# Altium PCB Final decision V3.PcbDoc (part 1 of 2)
Units mm, origin at the board's own origin, x right, y up, seen from the top; angles counter-clockwise.
Board outline 102.3 x 84 mm, 2 copper layers (Top Layer, Bottom Layer); 138 components, 123 nets, 552 pads, 289 vias.
Unrouted connection lines stored in the file: 2.
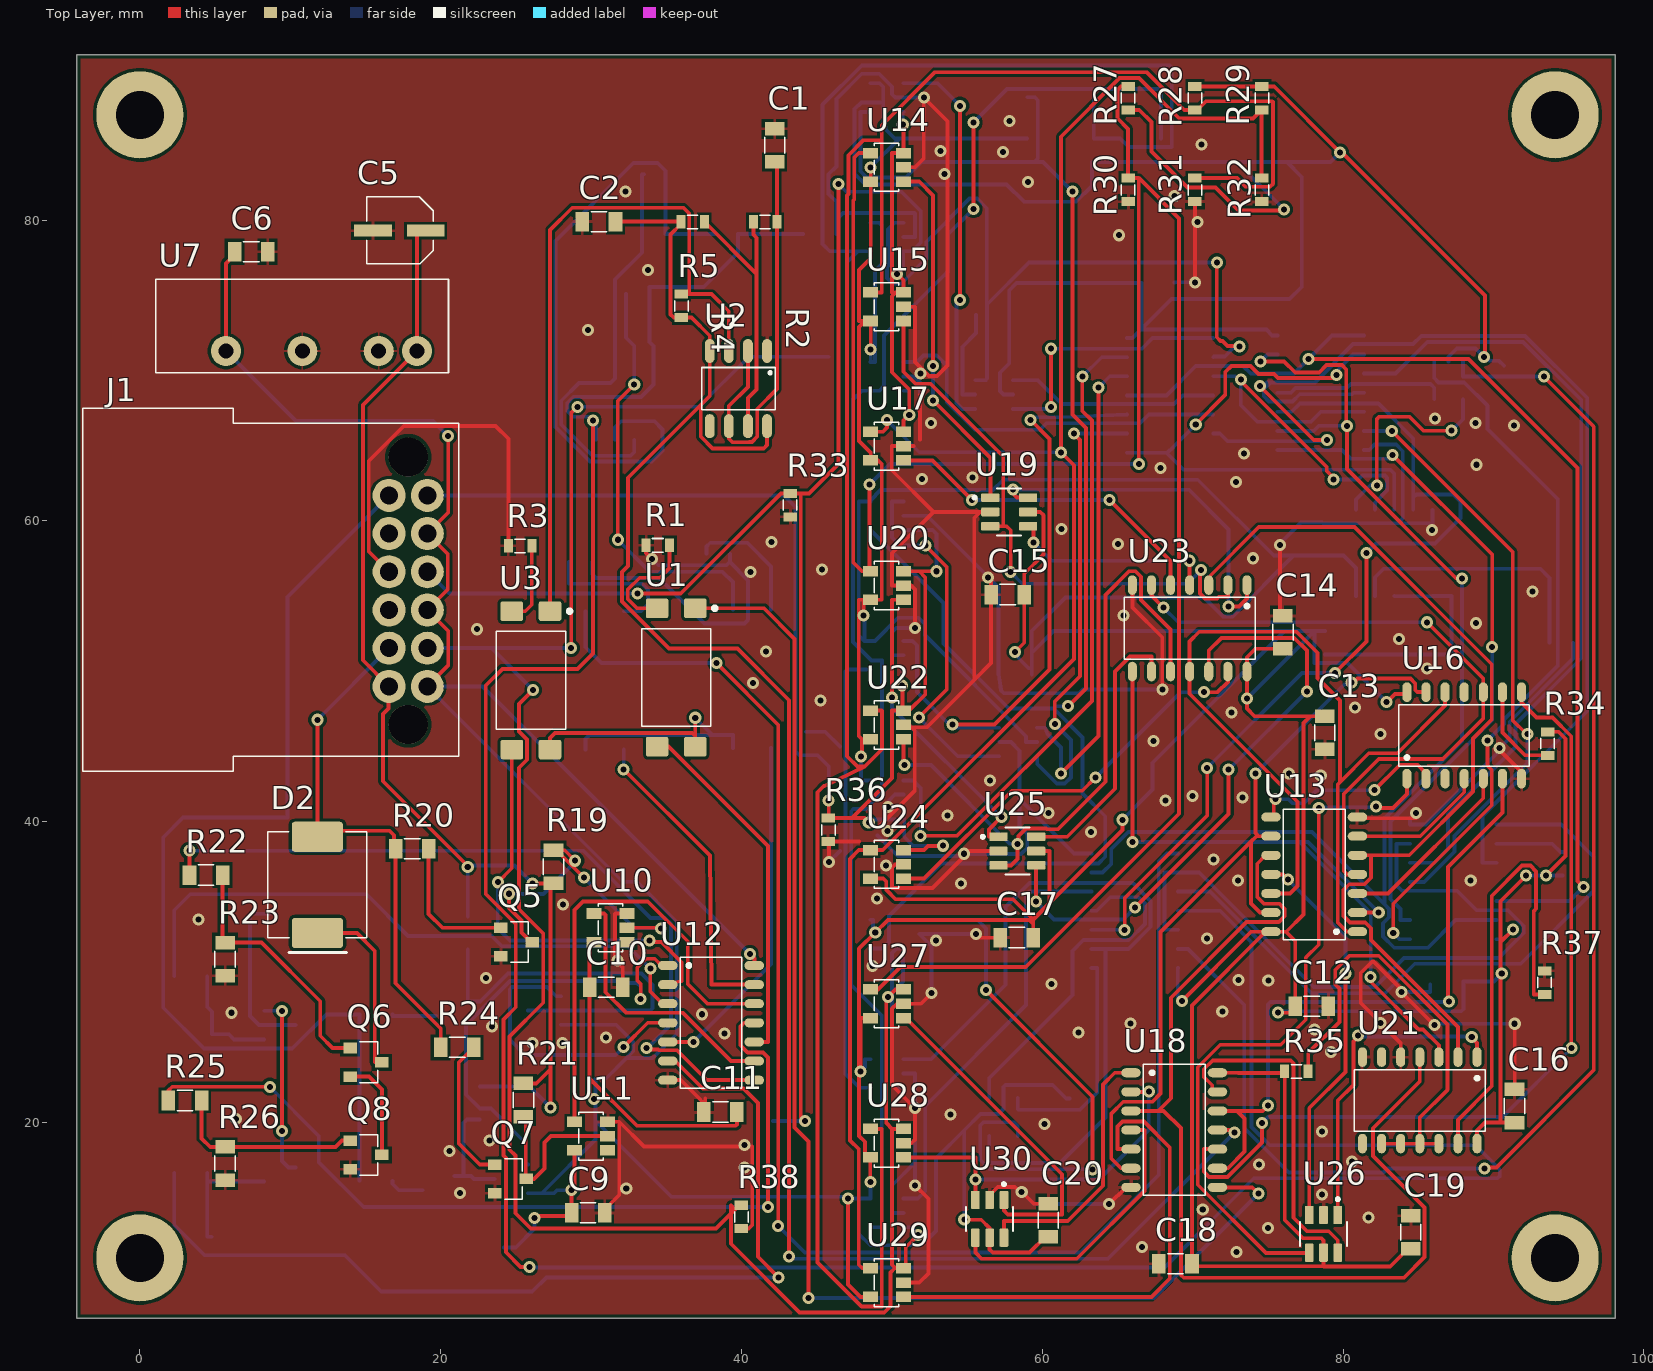
[diagram p0: Top Layer view]
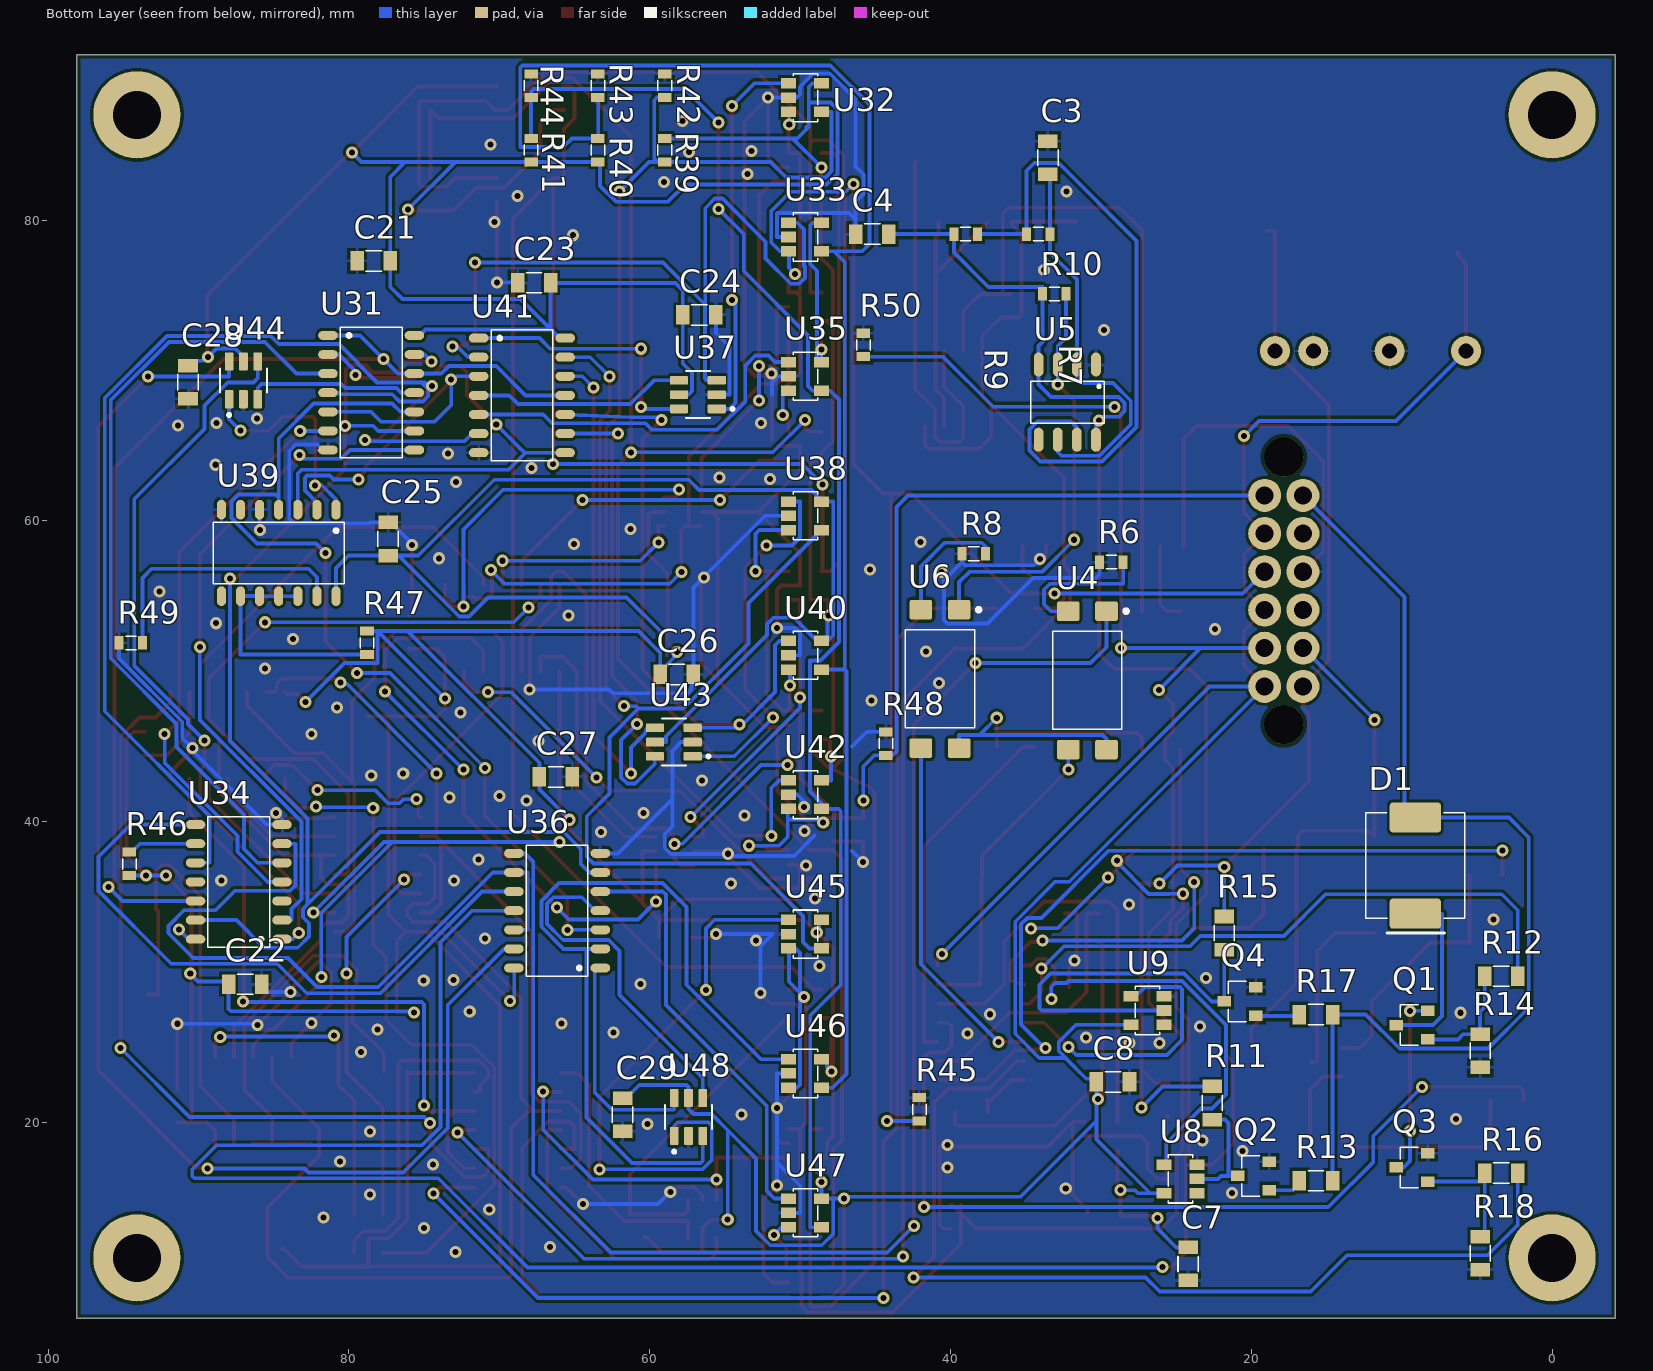
[diagram p1: Bottom Layer view, seen from below]

## Layer stack, top to bottom
Top Solder: solder mask 0.0102, Solder Resist, Dk 3.5
Top Layer: signal copper 0.0356
Dielectric 1: dielectric 0.32, FR-4, Dk 4.8
Bottom Layer: signal copper 0.0356
Bottom Solder: solder mask 0.0102, Solder Resist, Dk 3.5

## Board outline
-4.2,7 -4.2,91 98.1,91 98.1,7

## Design rules (kind name [scope] priority, off if disabled: settings)
AcuteAngle [All] p1: minimum=3.50000000000000E+0001 checktracksonly=FALSE
BoardOutlineClearance "BoardOutlineClearance 1" [All] p1: gap=0.25 ignorepadtopadclearanceinfootprint=FALSE except(0: Arc-SplitContinuation Track-SplitContinuation SMDPad-SplitContinuation THPad-SplitContinuation Via-SplitContinuation Fill-SplitContinuation Poly-SplitContinuation Region-SplitContinuation Text-SplitContinuation) // Milling
Clearance "Clearance-1 1/2 Oz" [All] p1: gap=0.125 ignorepadtopadclearanceinfootprint=FALSE except(0.2: Arc-Fill Arc-Poly Track-Fill Track-Poly SMDPad-SMDPad SMDPad-Fill SMDPad-Poly THPad-Fill THPad-Poly Via-Fill Via-Poly Fill-Fill Fill-Poly Poly-Poly Poly-Region Poly-Text; 0.25: Arc-Hole Track-Hole SMDPad-Hole THPad-Hole Via-Hole Fill-Hole Poly-Hole Region-Hole Text-Hole) // Standart
ComponentClearance [All] p1: gap=0.1 collisioncheckmode=3 verticalgap=0.1 showdistances=FALSE
DiffPairsRouting "DiffPairsRouting 1/2 Oz" [All] p1: maxlimit=0.254 minlimit=0.125 mostfreqgap=0.254 toplayer_minwidth=0.125 toplayer_maxwidth=0.381 toplayer_prefwidth=0.381 bottomlayer_minwidth=0.125 bottomlayer_maxwidth=0.381 bottomlayer_prefwidth=0.381 maxuncoupledlength=12.7
HoleSize "Minimum HoleSize" [IsPad] p1: absolutevalues=TRUE maxlimit=5.9 minlimit=0.6 maxpercent=80.000 minpercent=20.000
HoleSize "Minimum HoleSize VIA 1" [IsVia] p2: absolutevalues=TRUE maxlimit=5.9 minlimit=0.3 maxpercent=80.000 minpercent=20.000 // Standart
HoleToHoleClearance Hole2HoleClearance [All] p1: gap=0.25 allowstackedmicrovias=FALSE
MinimumAnnularRing "Minimum AR VIA Standart" [All] p1: minimumring=0.15
MinimumAnnularRing "Minimum AR PAD Standart" [All] p2: minimumring=0.2
MinimumSolderMaskSliver "SolderMask Bridge Standart" [All] p1: minsoldermaskwidth=0.15 // All Masks
PlaneClearance "PlaneClearance-1 1/2 Oz" [All] p1: clearance=0.2 // Standart
PlaneConnect "TermalConnect-1 1/2 Oz" [All] p1: planeconnectstyle=Relief reliefexpansion=0.2 reliefentries=4 reliefconductorwidth=0.2 reliefairgap=0.2 // Standart
PolygonConnect "PolygonConnect-1 1/2 Oz" [All] p1: thpad.connectstyle=Relief thpad.reliefconductorwidth=0.15 thpad.reliefentries=4 thpad.polygonreliefangle="90 Angle" thpad.airgapwidth=0.2 smdpad.connectstyle=Relief smdpad.reliefconductorwidth=0.2 smdpad.reliefentries=4 smdpad.polygonreliefangle="90 Angle" smdpad.airgapwidth=0.2 via.connectstyle=Direct via.reliefconductorwidth=0.254 via.reliefentries=4 via.polygonreliefangle="90 Angle" via.airgapwidth=0.254 // Standart
RoutingCorners [All] p1 off: cornerstyle=45-Degree minsetback=2.54 maxsetback=2.54
RoutingVias [All] p1: holewidth=0.4 width=0.8 viastyle="Through Hole" minholewidth=0.3 minwidth=0.6 maxholewidth=5.9 maxwidth=8.9
SilkToSilkClearance Silk2SilkClearance [All] p1 off: silktosilkclearance=0.15
SilkToSolderMaskClearance Silk2SolderMaskClearance [IsPad] p1 off: minsilkscreentomaskgap=0.15 clearancetoexposedcopper=TRUE
SolderMaskExpansion SolderMaskExpansion-1 [All] p1: expansion=0.05 istentingtop=FALSE // Standart
UnRoutedNet [All] p1: checkbadconnections=TRUE
Width "Width 1/2 Oz" [All] p1: maxlimit=10 minlimit=0.125 preferedwidth=0.254 checkconnectedcopper=TRUE
19 further rules are at their usual default settings.

## Classes and differential pairs
channel class SignalReciever: Reciever1 Reciever2
channel class Logic: Primary Secondary
component class "Sheet1 V2": C5 C6 C7 C8 C9 C10 C11 D1 D2 J1 Q1 Q2 Q3 Q4 Q5 Q6 Q7 Q8 R11 R12 R13 R14 R15 R16 R17 R18 R19 R20 R21 R22 R23 R24 R25 R26 U7 U8 U9 U10 U11 U12
component class Secondary: C3 C4 R6 R7 R8 R9 R10 U4 U5 U6
component class Reciever2: C21 C22 C23 C24 C25 C26 C27 C28 C29 R39 R40 R41 R42 R43 R44 R45 R46 R47 R48 R49 R50 U31 U32 U33 U34 U35 U36 U37 U38 U39 U40 U41 U42 U43 U44 U45 U46 U47 U48
component class Reciever1: C12 C13 C14 C15 C16 C17 C18 C19 C20 R27 R28 R29 R30 R31 R32 R33 R34 R35 R36 R37 R38 U13 U14 U15 U16 U17 U18 U19 U20 U22 U23 U24 U25 U26 U27 U28 U29 U30
component class Primary: C1 C2 R1 R2 R3 R4 R5 U1 U2 U3

## Components (designator, comment, footprint, x,y, rotation, side; value= is the part's Value field where it differs from the comment)
C1 "4.7uF" "0805 Capicator" 42.207,84.972 r90 top (schematic designator C12)
C2 "10nF" "0805 Capicator" 30.523,79.892 r0 top (schematic designator C13)
C3 "4.7uF" "0805 Capicator" 33.528,84.154 r90 bottom (schematic designator C12)
C4 "10nF" "0805 Capicator" 45.212,79.074 r180 bottom (schematic designator C13)
C5 "4.7uF" "Bar Cap 4x5.4" 15.5,79.3 r90 top (schematic designator C1)
C6 "4.7uF" "0805 Capicator" 7.4,77.9 r180 top (schematic designator C2)
C7 "0.1uF" "0805 Capicator" 24.2,10.6 r270 bottom (schematic designator C17)
C8 "0.1uF" "0805 Capicator" 29.2,22.7 r180 bottom (schematic designator C16)
C9 "0.1uF" "0805 Capicator" 29.8,14 r0 top (schematic designator C15)
C10 "0.1uF" "0805 Capicator" 31,29 r0 top (schematic designator C14)
C11 "0.1uF" "0805 Capicator" 38.6,20.7 r0 top (schematic designator C18)
C12 "0.1uF" "0805 Capicator" 77.918,27.736 r180 top (schematic designator C8)
C13 "0.1uF" "0805 Capicator" 78.784,45.915 r90 top (schematic designator C10)
C14 "0.1uF" "0805 Capicator" 76,52.6 r270 top (schematic designator C5)
C15 "0.1uF" "0805 Capicator" 57.7,55.1 r0 top (schematic designator C4)
C16 "0.1uF" "0805 Capicator" 91.4,21.1 r270 top (schematic designator C6)
C17 "0.1uF" "0805 Capicator" 58.3,32.3 r0 top (schematic designator C3)
C18 "0.1uF" "0805 Capicator" 68.856,10.61 r0 top (schematic designator C7)
C19 "0.1uF" "0805 Capicator" 84.5,12.7 r270 top (schematic designator C11)
C20 "0.1uF" "0805 Capicator" 60.4,13.5 r270 top (schematic designator C9)
C21 "0.1uF" "0805 Capicator" 78.355,77.29 r180 bottom (schematic designator C8)
C22 "0.1uF" "0805 Capicator" 86.9,29.2 r0 bottom (schematic designator C10)
C23 "0.1uF" "0805 Capicator" 67.691,75.842 r180 bottom (schematic designator C5)
C24 "0.1uF" "0805 Capicator" 56.7,73.7 r0 bottom (schematic designator C4)
C25 "0.1uF" "0805 Capicator" 77.4,58.8 r270 bottom (schematic designator C6)
C26 "0.1uF" "0805 Capicator" 58.2,49.8 r0 bottom (schematic designator C3)
C27 "0.1uF" "0805 Capicator" 66.238,42.977 r0 bottom (schematic designator C7)
C28 "0.1uF" "0805 Capicator" 90.7,69.223 r90 bottom (schematic designator C11)
C29 "0.1uF" "0805 Capicator" 61.801,20.509 r90 bottom (schematic designator C9)
D1 "Diode" DO-214AB(SMC) 9.097,37.087 r270 bottom (schematic designator D2)
D2 "Diode" DO-214AB(SMC) 11.8,35.8 r270 top (schematic designator D1)
J1 "Conn6x2" Conn6x2(Molex) 17.842,64.242 r270 top
Q1 "MOSFET-N[FDN337N]" SOT-23 8.267,25.53 r90 bottom (schematic designator Q5)
Q2 "NPN" SOT-23 18.8,15.5 r90 bottom (schematic designator Q8)
Q3 "MOSFET-N[FDN337N]" SOT-23 8.267,16.071 r90 bottom (schematic designator Q6)
Q4 "NPN" SOT-23 19.7,27.1 r90 bottom (schematic designator Q7)
Q5 "NPN" SOT-23 24,32.95 r270 top (schematic designator Q4)
Q6 "MOSFET-N[FDN337N]" SOT-23 13.982,24.956 r270 top (schematic designator Q1)
Q7 "NPN" SOT-23 23.6,17.2 r270 top (schematic designator Q3)
Q8 "MOSFET-N[FDN337N]" SOT-23 13.982,18.799 r270 top (schematic designator Q2)
R1 "1k" "0603 Resistor" 34.434,58.383 r0 top (schematic designator R31)
R2 "51k" "0603 Resistor" 41.572,79.892 r0 top (schematic designator R29)
R3 "1k" "0603 Resistor" 25.28,58.337 r0 top (schematic designator R33)
R4 "4.7k" "0603 Resistor" 36.746,79.892 r0 top (schematic designator R30)
R5 "22k" "0603 Resistor" 36,74.3 r90 top (schematic designator R32)
R6 "1k" "0603 Resistor" 29.301,57.265 r180 bottom (schematic designator R31)
R7 "51k" "0603 Resistor" 34.163,79.074 r180 bottom (schematic designator R29)
R8 "1k" "0603 Resistor" 38.455,57.819 r180 bottom (schematic designator R33)
R9 "4.7k" "0603 Resistor" 38.989,79.074 r180 bottom (schematic designator R30)
R10 "22k" "0603 Resistor" 33.1,75.1 r180 bottom (schematic designator R32)
R11 "1k" "0805 Resistor" 22.6,21.3 r90 bottom (schematic designator R16)
R12 "20k" "0805 Resistor" 3.382,29.721 r180 bottom (schematic designator R10)
R13 "20k" "0805 Resistor" 15.701,16.132 r180 bottom (schematic designator R14)
R14 "10k" "0805 Resistor" 4.779,24.768 r90 bottom (schematic designator R11)
R15 "1k" "0805 Resistor" 21.8,32.6 r90 bottom
R16 "20k" "0805 Resistor" 3.382,16.64 r180 bottom (schematic designator R9)
R17 "20k" "0805 Resistor" 15.701,27.181 r180 bottom (schematic designator R13)
R18 "10k" "0805 Resistor" 4.779,11.306 r90 bottom (schematic designator R12)
R19 "1k" "0805 Resistor" 27.5,37 r270 top (schematic designator R8)
R20 "20k" "0805 Resistor" 18.1,38.2 r180 top (schematic designator R6)
R21 "1k" "0805 Resistor" 25.5,21.5 r90 top (schematic designator R7)
R22 "20k" "0805 Resistor" 4.398,36.452 r180 top (schematic designator R1)
R23 "10k" "0805 Resistor" 5.668,30.864 r90 top (schematic designator R3)
R24 "20k" "0805 Resistor" 21.1,25 r180 top (schematic designator R5)
R25 "20k" "0805 Resistor" 3.001,21.466 r180 top (schematic designator R2)
R26 "10k" "0805 Resistor" 5.668,17.275 r90 top (schematic designator R4)
R27 "1k" "0603 Resistor" 65.707,88.11 r90 top (schematic designator R23)
R28 "2k" "0603 Resistor" 70.152,88.11 r90 top (schematic designator R25)
R29 "3k" "0603 Resistor" 74.597,88.11 r90 top (schematic designator R27)
R30 "3k9" "0603 Resistor" 65.707,82.014 r90 top (schematic designator R24)
R31 "3k" "0603 Resistor" 70.152,82.014 r90 top (schematic designator R26)
R32 "2k" "0603 Resistor" 74.597,82.014 r90 top (schematic designator R28)
R33 "1k" "0603 Resistor" 43.239,61.05 r90 top (schematic designator R17)
R34 "1k" "0603 Resistor" 93.6,45.2 r90 top (schematic designator R20)
R35 "10k" "0603 Resistor" 76.9,23.4 r0 top (schematic designator R21)
R36 "1k" "0603 Resistor" 45.779,39.46 r90 top (schematic designator R18)
R37 "10k" "0603 Resistor" 93.4,29.3 r90 top (schematic designator R22)
R38 "1k" "0603 Resistor" 40,13.72 r90 top (schematic designator R19)
R39 "1k" "0603 Resistor" 59.002,84.653 r270 bottom (schematic designator R23)
R40 "2k" "0603 Resistor" 63.447,84.653 r270 bottom (schematic designator R25)
R41 "3k" "0603 Resistor" 67.892,84.653 r270 bottom (schematic designator R27)
R42 "3k9" "0603 Resistor" 59.002,88.949 r270 bottom (schematic designator R24)
R43 "3k" "0603 Resistor" 63.447,88.949 r270 bottom (schematic designator R26)
R44 "2k" "0603 Resistor" 67.892,88.949 r270 bottom (schematic designator R28)
R45 "1k" "0603 Resistor" 42.076,20.876 r270 bottom (schematic designator R17)
R46 "1k" "0603 Resistor" 94.6,37.2 r270 bottom (schematic designator R20)
R47 "10k" "0603 Resistor" 78.8,51.9 r270 bottom (schematic designator R21)
R48 "1k" "0603 Resistor" 44.3,45.2 r270 bottom (schematic designator R18)
R49 "10k" "0603 Resistor" 94.5,51.9 r0 bottom (schematic designator R22)
R50 "1k" "0603 Resistor" 45.8,71.7 r270 bottom (schematic designator R19)
U1 "Opt" FAIR-MDIP-4_V 35.656,49.593 r270 top (schematic designator U52)
U2 "NE555P" SOIC-8 41.699,71.303 r270 top (schematic designator U53)
U3 "Opt" FAIR-MDIP-4_V 26,49.4 r270 top (schematic designator U54)
U4 "Opt" FAIR-MDIP-4_V 30.9,49.4 r270 bottom (schematic designator U52)
U5 "NE555P" SOIC-8 30.33,70.4 r270 bottom (schematic designator U53)
U6 "Opt" FAIR-MDIP-4_V 40.7,49.5 r270 bottom (schematic designator U54)
U7 "DC/DC" SIP7 18.42,71.3 r270 top (schematic designator U1)
U8 "Single inverter" SOT-23-5 23.6,16.25 r90 bottom (schematic designator U6)
U9 "Single inverter" SOT-23-5 25.8,27.45 r90 bottom (schematic designator U4)
U10 "Single inverter" SOT-23-5 32.4,32.95 r90 top (schematic designator U3)
U11 "Single inverter" SOT-23-5 31.1,19.1 r90 top (schematic designator U2)
U12 "2AND" SOIC-14 35.1,30.44 r270 top (schematic designator U9)
U13 "2XOR" SOIC-14 80.958,32.689 r90 top (schematic designator U36)
U14 "Comparator" SOT-23-5 50.769,83.514 r90 top (schematic designator U15)
U15 "Comparator" SOT-23-5 50.769,74.245 r90 top (schematic designator U16)
U16 "4AND" SOIC-14 84.245,42.867 r0 top (schematic designator U45)
U17 "Comparator" SOT-23-5 50.769,64.975 r90 top
U18 "2AND" SOIC-14 65.9,23.31 r270 top (schematic designator U29)
U19 "Inv" SOT236 57.8,60.6 r0 top (schematic designator U5)
U20 "Comparator" SOT-23-5 50.769,55.706 r90 top (schematic designator U18)
U21 "4NOR" SOIC-14 88.91,24.35 r180 top (schematic designator U41)
U22 "Comparator" SOT-23-5 50.769,46.436 r90 top (schematic designator U19)
U23 "2AND" SOIC-14 73.61,55.738 r180 top (schematic designator U28)
U24 "Comparator" SOT-23-5 50.769,37.167 r90 top (schematic designator U20)
U25 "Inv" SOT236 58.345,38.05 r0 top (schematic designator U23)
U26 "Inv" SOT236 78.7,12.6 r270 top (schematic designator U43)
U27 "Comparator" SOT-23-5 50.769,27.897 r90 top (schematic designator U12)
U28 "Comparator" SOT-23-5 50.769,18.628 r90 top (schematic designator U13)
U29 "Comparator" SOT-23-5 50.769,9.358 r90 top (schematic designator U14)
U30 "Inv" SOT236 56.5,13.6 r270 top (schematic designator U21)
U31 "2XOR" SOIC-14 81.395,72.337 r270 bottom (schematic designator U36)
U32 "Comparator" SOT-23-5 50.769,88.149 r270 bottom (schematic designator U15)
U33 "Comparator" SOT-23-5 50.769,78.879 r270 bottom (schematic designator U16)
U34 "4AND" SOIC-14 84.45,32.19 r90 bottom (schematic designator U45)
U35 "Comparator" SOT-23-5 50.769,69.61 r270 bottom (schematic designator U17)
U36 "2AND" SOIC-14 63.282,30.277 r90 bottom (schematic designator U29)
U37 "Inv" SOT236 56.8,68.4 r0 bottom (schematic designator U5)
U38 "Comparator" SOT-23-5 50.769,60.34 r270 bottom (schematic designator U18)
U39 "4NOR" SOIC-14 80.86,60.75 r0 bottom (schematic designator U41)
U40 "Comparator" SOT-23-5 50.769,51.071 r270 bottom (schematic designator U19)
U41 "2AND" SOIC-14 71.374,72.159 r270 bottom (schematic designator U28)
U42 "Comparator" SOT-23-5 50.769,41.801 r270 bottom (schematic designator U20)
U43 "Inv" SOT236 58.4,45.3 r0 bottom (schematic designator U23)
U44 "Inv" SOT236 87.017,69.35 r90 bottom (schematic designator U43)
U45 "Comparator" SOT-23-5 50.769,32.532 r270 bottom (schematic designator U12)
U46 "Comparator" SOT-23-5 50.769,23.262 r270 bottom (schematic designator U13)
U47 "Comparator" SOT-23-5 50.769,13.993 r270 bottom (schematic designator U14)
U48 "Inv" SOT236 57.422,20.367 r90 bottom (schematic designator U21)

## Footprints (in the part's own frame and the unit in brackets; to place one, negate y for a bottom-side part, rotate by r counter-clockwise, add the part's x,y. Pads: shape width x height; smd on the part's side, far side on the other; paste and mask are expansions set on the pad)
"0603 Resistor" [mm]
  rect 0.6x0.9 smd: 1(-0.78,0) 2(0.78,0)
  silkscreen extent -0.35,-0.45 0.35,0.45, body extent -0.85,-0.45 0.85,0.45, height 0.55
"0805 Capicator" [mm]
  rect 0.9x1.3 smd: 1(-1.1,0) 2(1.1,0)
  silkscreen extent -0.52,-0.67 0.52,0.67, body extent -1.05,-0.67 1.05,0.68, height 0.75
"0805 Resistor" [mm]
  rect 0.9x1.3 smd: 1(-1.1,0) 2(1.1,0)
  silkscreen extent -0.53,-0.67 0.53,0.67, body extent -1.05,-0.67 1.05,0.68, height 0.6
"Bar Cap 4x5.4" [mm]
  rect 0.8x2.5 smd: 1(0,0) 2(0,-3.5)
  silkscreen extent -2.2,-4 2.25,0.42, body extent -2.15,-4.3 2.15,0.7, height 5.4
Conn6x2(Molex) [mm]
  round 2.2 hole 1.2: 1(2.54,1.27) 2(5.08,1.27) 3(7.62,1.27) 4(10.16,1.27) 5(12.7,1.27) 6(15.24,1.27) 7(2.54,-1.27) 8(5.08,-1.27) 9(7.62,-1.27) 10(10.16,-1.27) 11(12.7,-1.27) 12(15.24,-1.27)
  round 2.6 hole 2.6 unplated: A(0,0) A(17.78,0)
  silkscreen extent -3.25,-21.63 20.88,3.37, body extent -3.15,-31.93 20.79,3.23, height 22.06
DO-214AB(SMC) [mm]
  rrect20% 2x3.4 smd: 1(-3.2,0) 2(3.2,0)
  silkscreen extent -3.53,-3.3 4.5,3.3, body extent -4.06,-3.15 4.06,3.15, height 2.77
FAIR-MDIP-4_V [mm]
  rrect20% 1.3x1.5 smd: 1(-4.6,1.27) 2(-4.6,-1.27) 3(4.6,-1.27) 4(4.6,1.27)
  silkscreen extent -4.72,-2.3 3.25,2.7, body extent -5.08,-2.3 5.08,2.3, height 3.85
SIP7 [mm]
  round 2 hole 1: 1(0,0) 2(0,-2.54) 4(0,-7.62) 6(0,-12.7)
  silkscreen extent -4.77,-17.35 1.45,2.1, body extent -4.7,-17.27 1.39,2.03, height 10.16
SOIC-8 [mm]
  oval 1.6x0.65 smd: 1(0,0) 2(0,-1.27) 3(0,-2.54) 4(0,-3.81) 5(5,-3.81) 6(5,-2.54) 7(5,-1.27) 8(5,0)
  silkscreen extent 1.1,-4.35 3.9,0.55, body extent -0.36,-4.35 5.41,0.55, height 1.45
SOIC-14 [mm]
  oval 0.6x1.3 smd paste+0 mask+0.1: 1(0,0) 2(1.27,0) 3(2.54,0) 4(3.81,0) 5(5.08,0) 6(6.35,0) 7(7.62,0) 8(7.62,5.75) 9(6.35,5.75) 10(5.08,5.75) 11(3.81,5.75) 12(2.54,5.75) 13(1.27,5.75) 14(0,5.75)
  silkscreen extent -0.55,0.82 8.15,4.93, body extent -0.52,-0.12 8.13,5.87, height 1.75
SOT236 [mm]
  rrect25% 1.21x0.58 smd: 1(-1.255,0.95) 2(-1.255,0) 3(-1.255,-0.95) 4(1.255,-0.95) 5(1.255,0) 6(1.255,0.95)
  silkscreen extent -2.4,-1.56 0.8,1.56, body extent -1.4,-1.45 1.4,1.45, height 1.45
SOT-23 [mm]
  rect 0.7x0.9 smd: 1(0,0) 2(1.9,0) 3(0.95,2.1)
  silkscreen extent -0.4,0.65 2.3,1.83, body extent -0.55,-0.18 2.45,2.22, height 1.1
SOT-23-5 [mm]
  rect 0.7x1 smd mask+0.045: 1(-0.95,0) 2(0,0) 3(0.95,0) 4(0.95,2.2) 5(-0.95,2.2)
  silkscreen extent -1.6,0.3 1.6,1.93, body extent -1.5,-0.15 1.5,2.35, height 1.1

## Part data
C1 C3 C6: library part "Cap 4.7uF (0805)", "4.7uF X5R 10% 25V 0805", Manufacturer="Murata Manufacturing", Part Number=GRM21BR61E475KA12L, ComponentLink1Description=Chip&Dip, ComponentLink1URL=https://www.chipdip.ru/product/grm21br61e475ka12l, Type=Capacitor
C2 C4: library part "Cap 10nF (0805)", "0805 X7R 10nF 100V 10%", Manufacturer="Murata Manufacturing", Part Number=GRM21BR72A103KA01L, ComponentLink1Description=Chip&Dip, ComponentLink1URL=https://www.chipdip.ru/product/grm21br72a103ka01l, Type=Capacitor
C5: library part "Cap Pol 4.7uF", "ECAP SMD,  35V, 105°C", Manufacturer=Epcos, Part Number=B41121A7475M000, ComponentLink1Description=Chip&Dip, ComponentLink1URL=https://www.chipdip.ru/product/b41121a7475m000, Type=Capacitor
C7 C8 C9 C10 C11 C12 C13 C14 C15 C16 C17 C18 C19 C20 C21 C22 C23 C24 C25 C26 C27 C28 C29: library part "Cap 0.1uF (0805)", "0.1uF X7R 50V 10% 0805", Manufacturer="Murata Manufacturing", Part Number=GRM21BR71E104KA01L, ComponentLink1Description=Chip&Dip, ComponentLink1URL=https://www.chipdip.ru/product/grm21br71e104ka01l, Type=Capacitor
D1 D2: library part "Diode (SMC)", "3A 50V, (DO-214AB/SMC)", Manufacturer="Yangzhou Yangjie Electronic Technology", Part Number=GS3A, ComponentLink1Description=DataSheet, ComponentLink1URL=https://static.chipdip.ru/lib/152/DOC001152906.pdf, ComponentLink2Description=Chip&Dip, ComponentLink2URL=https://www.chipdip.ru/product/gs3a, Type=Diode
J1: library part "Conn 12 [Stack64]", "Stac64 Right-Angle Header Assembly, 12 Circuits, Polarization A, Black, Tray / Current - Maximum per Contact 10.0A / Voltage - Maximum 500V", ComponentLink1Description=Molex, ComponentLink1URL=https://www.molex.com/molex/products/part-detail/pcb_headers/0346910120, ComponentLink2Description=DataSheet, ComponentLink2URL=https://www.molex.com/webdocs/datasheets/pdf/en-us/0346910120_PCB_HEADERS.pdf
Q1 Q3 Q6 Q8: "30V, 2.2A, 0.054Ohm", ComponentLink1Description=ChipDip, ComponentLink1URL=https://www.chipdip.ru/product/fdn337n, ComponentLink2Description=Datasheet, ComponentLink2URL=https://static.chipdip.ru/lib/164/DOC001164605.pdf
Q2 Q4 Q5 Q7: library part "NPN [BC817]", "NPN general-purpose transistors", Manufacturer=Nexperia, Part Number=BC817-40,215, ComponentLink1Description=DataSheet, ComponentLink1URL=https://static.chipdip.ru/lib/156/DOC000156781.pdf, ComponentLink2Description=Chip&Dip, ComponentLink2URL=https://www.chipdip.ru/product/bc817-40, Type=Transistor
R1 R3 R6 R8 R27 R33 R34 R36 R38 R39 R45 R46 R48 R50: library part "Res 1k (0603)", "0.1W 0603 1k, 1%", Manufacturer=Taiwan, Part Number=RC0603FR-071KL, ComponentLink1Description=Chip&Dip, ComponentLink1URL=https://www.chipdip.ru/product0/9000079676, Type=Resistor
R2 R7: library part "Res 51k (0603)", "0.1W 0603 51k, 1%", Manufacturer=Taiwan, Part Number=RC0603FR-0751KL, ComponentLink1Description=Chip&Dip, ComponentLink1URL=https://www.chipdip.ru/product0/9000079753, Type=Resistor
R4 R9: library part "Res 4.7k (0603)", "0.1W 0603 4.7k, 1%", Manufacturer=Taiwan, Part Number=RC0603FR-074K7L, ComponentLink1Description=Chip&Dip, ComponentLink1URL=https://www.chipdip.ru/product0/9000079728, Type=Resistor
R5 R10: library part "Res 22k (0.1W 0603 22k, 1%)", "0.1W 0603 22k, 1%"
R11 R15 R19 R21: library part "Res 1k (0805)", "0.125W 0805 1k, 1%", Manufacturer=Taiwan, Part Number=RC0805FR-071KL, ComponentLink1Description=Chip&Dip, ComponentLink1URL=https://www.chipdip.ru/product0/9000079486, Type=Resistor
R12 R13 R16 R17 R20 R22 R24 R25: library part "Res 10k (0805)", "0.125W 0805 20k, 1%", Manufacturer=Taiwan, Part Number=RC0805FR-0720KL, ComponentLink1Description=Chip&Dip, ComponentLink1URL=https://www.chipdip.ru/product0/9000079521, Type=Resistor
R14 R18 R23 R26: library part "Res 10k (0805)", "0.125W 0805 10k, 1%", Manufacturer=Taiwan, Part Number=RC0805FR-0710KL, ComponentLink1Description=Chip&Dip, ComponentLink1URL=https://www.chipdip.ru/product0/9000079514, Type=Resistor
R28 R32 R40 R44: library part "Res 2k (0603)", "0.1W 0603 2k, 1%", Manufacturer=Taiwan, Part Number=RC0603FR-072KL, ComponentLink1Description=Chip&Dip, ComponentLink1URL=https://www.chipdip.ru/product0/9000079719, Type=Resistor
R29 R31 R41 R43: library part "Res 3k (0603)", "0.1W 0603 3k, 1%", Manufacturer=Taiwan, Part Number=RC0603FR-073KL, ComponentLink1Description=Chip&Dip, ComponentLink1URL=https://www.chipdip.ru/product0/9000079723, Type=Resistor
R30 R42: library part "Res 3.9k (0603)", "0.1W 0603 3.9k, 1%", Manufacturer=Taiwan, Part Number=RC0603FR-073K9L, ComponentLink1Description=Chip&Dip, ComponentLink1URL=https://www.chipdip.ru/product0/9000079726, Type=Resistor
R35 R37 R47 R49: library part "Res 10k (0603)", "0.1W 0603 10k, 1%", Manufacturer=Taiwan, Part Number=RC0603FR-0710KL, ComponentLink1Description=Chip&Dip, ComponentLink1URL=https://www.chipdip.ru/product0/9000079736, Type=Resistor
U1 U3 U4 U6: library part "Optocoupler [FOD817B]", "Phototransistor Optocoupler, 4 us Rise, 3 us Fall, 5000 Vrms, -55 to 110 degC, 4-Pin MDIP, RoHS, Tape and Reel", Manufacturer="ON Semiconductor", Part Nomber=FOD817B, ComponentLink1Description=Chip&Dip, ComponentLink1URL=https://www.chipdip.ru/product/fod817b, ComponentLink2Description=DataSheet, ComponentLink2URL=https://static.chipdip.ru/lib/297/DOC000297284.pdf
U2 U5: "Standard Timer Single 8-Pin PDIP Tube", Case/Package=PDIP, Current Rating=10mA, Frequency=500kHz, High Level Output Current=-200mA, Low Level Output Current=200mA, Manufacturer="Texas Instruments", Max Operating Temperature=70°C, Max Supply Voltage=16V, Min Operating Temperature=0°C, Min Supply Voltage=4.5V, Nominal Supply Current=2mA, Operating Supply Voltage=5V, Package Quantity=50, Quiescent Current=15mA, Category="Clock and Timing", ComponentLink1Description=https://datasheet.ciiva.com/1139/sa555-1139904.pdf?src-supplier=Element14, ComponentLink1URL=https://datasheet.ciiva.com/1139/sa555-1139904.pdf?src-supplier=Element14, ComponentLink2Description=https://datasheet.ciiva.com/19457/904085-19457361.pdf?src-supplier=Jameco, ComponentLink2URL=https://datasheet.ciiva.com/19457/904085-19457361.pdf?src-supplier=Jameco, ComponentLink3Description=https://datasheet.ciiva.com/26325/152184-da-01-en-ne555p-timer-tid-26325915.pdf?src-supplier=Conrad, ComponentLink3URL=https://datasheet.ciiva.com/26325/152184-da-01-en-ne555p-timer-tid-26325915.pdf?src-supplier=Conrad, ComponentLink4Description=https://datasheet.ciiva.com/1147/1764032-1147750.pdf?src-supplier=Newark, ComponentLink4URL=https://datasheet.ciiva.com/1147/1764032-1147750.pdf?src-supplier=Newark, ComponentLink5Description=https://datasheet.ciiva.com/14094/ne555-series-eng-tds-14094950.pdf?src-supplier=Distrelec, ComponentLink5URL=https://datasheet.ciiva.com/14094/ne555-series-eng-tds-14094950.pdf?src-supplier=Distrelec, ComponentLink6Description=https://datasheet.ciiva.com/14274/ne555-14274456.pdf?src-supplier=Avnet, ComponentLink6URL=https://datasheet.ciiva.com/14274/ne555-14274456.pdf?src-supplier=Avnet, ComponentLink7Description=https://datasheet.ciiva.com/15152/getdatasheetpartid-248510-15152620.pdf?src-supplier=Verical, ComponentLink7URL=https://datasheet.ciiva.com/15152/getdatasheetpartid-248510-15152620.pdf?src-supplier=Verical, ComponentLink8Description=https://datasheet.ciiva.com/1233/ne555-1233454.pdf?src-supplier=Digi-Key, ComponentLink8URL=https://datasheet.ciiva.com/1233/ne555-1233454.pdf?src-supplier=Digi-Key, ComponentLink9Description=https://datasheet.ciiva.com/26228/ne555-26228892.pdf?src-supplier=Avnet+Europe, ComponentLink9URL=https://datasheet.ciiva.com/26228/ne555-26228892.pdf?src-supplier=Avnet+Europe, Contact Plating=Gold, Height=4.57mm, Lead Free="Lead Free", Length=9.81mm, Manufacturer Part Number=NE555P, Mount=SMD, Number of Pins=8, Number of Timers/Counters=1, Operating Supply Current=10mA, Packaging=Rail/Tube, Pricing 1="1=0,37000, 10=0,29900, 25=0,27360, 100=0,20350, 250=0,18444, 500=0,15264, 1000=0,11448, 2500=0,10494, 5000=0,10020 (USD)", Radiation Hardening=No, REACH SVHC="No SVHC", RoHS=Yes, RoHS Compliant=Yes, Supplier 1=Digi-Key, Weight=0.015535oz, Width=6.35mm
U7: library part "DC/DC Isolated 5V [TMH]", "The TMH series are ultra miniature, isolated 2 Watt DC/DC-converters in a Single-in-Line  package  (SIP)", Manufacturer="Traco Power", Part Number=TMH2405S, ComponentLink1Description=Chip&Dip, ComponentLink1URL=https://www.chipdip.ru/product/tmh-2405s, ComponentLink2Description=DataSheet, ComponentLink2URL=https://static.chipdip.ru/lib/005/DOC001005854.pdf, Type=IC
U12 U18 U23 U36 U41: library part "4 (2AND)", "4 (2AND)", Chip&Dip=https://www.chipdip.ru/product/sn74ac08dr
U13 U31: library part "4 (2XOR)", Chip&Dip=https://www.chipdip.ru/product/74hc86d
U14 U15 U17 U20 U22 U24 U27 U28 U29 U32 U33 U35 U38 U40 U42 U45 U46 U47: library part "Comparator [LMV]", "LMV7219 7-ns 2.7-V to 5-V Comparator with Rail-to-Rail Output", Manufacturer="Texas Instruments", Part Number=LMV7219M5X/NOPB, ComponentLink1Description=DataSheet, ComponentLink1URL=http://www.ti.com/lit/ds/symlink/lmv7219.pdf, ComponentLink2Description=Mouser, ComponentLink2URL=https://ru.mouser.com/ProductDetail/Texas-Instruments/LMV7219M5X-NOPB?qs=sGAEpiMZZMuayl%2FEk2kXcbEcxwmoPguctVQUIBgrLJY%3D, Type=IC
U16 U34: library part "2 (4AND)", "2 (4AND)", Chip&Dip=https://www.chipdip.ru/product/74hc21d.653
U19 U26 U30 U37 U44 U48: library part Inverter, "Inverter", Chip&Dip=https://www.chipdip.ru/product/sn74lvc2g04dbvr-2
U21 U39: library part "2 (4NOR)", "2 (4NOR)", Chip&Dip=https://www.chipdip.ru/product/74hc4002d
U25 U43: library part Inverter, Chip&Dip=https://www.chipdip.ru/product/sn74lvc2g04dbvr-2
U8 U9 U10 U11: ComponentLink1Description=ChipDip, ComponentLink1URL=https://www.chipdip.ru/product/nc7sz14m5x

## Free pads (board coordinates)
  round 5.8 hole 3.2: A(0,11) A(0,87) A(94.1,11) A(94.1,87)

## Via types
v1: diameter 0.8, hole 0.4, Top Layer to Bottom Layer, tented both sides, 289 vias

## Nets (pads, with @x,y where several pads share a name; then routed paths per layer and width w, separated by ;. In a path a pad name is that pad's centre, name@x,y a point inside that pad or via, vN(x,y) a via of type N, cw(c..) or ccw(c..) an arc to the next point about the centre after c; other vN are vias at no path point)
2V_Comp1_Reciever1: U17.1 U23.5 | length 22.1
  Top Layer w0.254: U17.1@50.769,64.025 52.705,64.025 v1(55.338,61.392) ; v1(64.465,61.392) 68.53,57.327 U23.5@68.53,55.738
  Bottom Layer w0.254: v1(55.338,61.392) v1(64.465,61.392)
2V_Comp1_Reciever2: U35.1 U41.5 | length 24.6
  Bottom Layer w0.254: U35.1@50.769,70.56 51.679,70.56 52.112,70.993 52.987,70.993 53.643,70.336 53.643,67.949 55.527,66.065 59.851,66.065 60.283,66.497 66.497,66.497 67.079,67.079 U41.5@71.374,67.079
2V_Comp2_Reciever1: U23.13 U24.1 | length 27.7
  Top Layer w0.254: U24.1@50.769,36.217 52.146,36.217 57.988,42.059 62.658,42.059 v1(63.551,42.951) ; v1(70.739,48.616) 71.653,48.616 72.34,49.302 U23.13@72.34,49.988
  Bottom Layer w0.254: v1(63.551,42.951) 69.215,48.616 v1(70.739,48.616)
2V_Comp2_Reciever2: U41.13 U42.1 | length 45
  Top Layer w0.254: v1(51.918,39.065) 54.331,39.065 63.3,48.035 63.3,66.674 62.662,67.312 v1(62.662,69.594)
  Bottom Layer w0.254: U42.1@50.769,42.751 51.41,42.751 51.918,42.243 v1(51.918,39.065) ; v1(62.662,69.594) 63.957,70.889 U41.13@65.624,70.889
2V_Comp3_Reciever1: U18.5 U29.1 | length 33.7
  Top Layer w0.254: U29.1@50.769,8.408 67.259,8.408 68.478,9.627 68.478,18.349 66.762,20.066 65.329,20.066 64.998,19.735 64.998,18.23 U18.5@65.9,18.23
2V_Comp3_Reciever2: U36.5 U47.1 | length 28.6
  Bottom Layer w0.254: U47.1@50.769,14.943 51.722,14.943 52.222,15.443 52.222,21.107 58.928,27.813 58.928,35.154 59.131,35.357 U36.5@63.282,35.357
2V_Reciever1: R29.1 R32.2 U17.4 U24.4 U29.4 | length 118.6
  Top Layer w0.254: U29.4@48.569,10.308 48.036,10.308 47.803,10.541 47.803,18.232 47.219,18.816 47.219,37.532 47.803,38.117 U24.4@48.569,38.117 49.394,38.117 62.1,50.822 62.1,63.706 v1(61.239,64.567) 61.239,85.546 65.136,89.443 66.431,89.443 69.107,86.766 74.011,86.766 R29.1@74.574,87.33 ; U17.4@48.569,65.925 49.39,65.925 49.682,66.218 v1(49.682,66.7) ; R32.2@74.597,82.794 74.574,82.794 R29.1@74.574,87.33 ; R29.1@74.597,87.33 R29.1@74.574,87.33
  Bottom Layer w0.254: v1(49.682,66.7) 51.816,64.567 v1(61.239,64.567)
2V_Reciever2: R41.1 R44.2 U35.4 U42.4 U47.4 | length 98.3
  Top Layer w0.254: v1(55.423,80.747) v1(55.423,86.487)
  Bottom Layer w0.254: U47.4@48.569,13.043 49.327,13.043 49.327,27.123 47.3,29.15 47.3,40.703 47.449,40.851 U42.4@48.569,40.851 48.569,41.224 49.352,42.007 49.352,50.724 48.649,50.724 47.422,51.951 47.422,68.072 48.01,68.66 U35.4@48.569,68.66 49.174,68.66 49.481,68.967 49.481,72.341 53.743,76.603 53.743,79.067 v1(55.423,80.747) ; v1(55.423,86.487) 57.658,88.722 67.691,88.722 67.892,88.521 R44.2@67.892,88.169 67.894,88.169 67.894,85.433 R41.1@67.892,85.433
3V_Comp1_Reciever1: U15.1 U19.3 U23.2 | length 39
  Top Layer w0.254: U15.1@50.769,73.295 50.775,73.295 50.775,69.925 51.578,69.122 52.568,69.122 57.404,64.285 57.404,59.65 ; U19.3@56.545,59.65 57.404,59.65 ; v1(57.9,56.6) 57.9,59.383 57.633,59.65 57.404,59.65 ; v1(70.544,56.727) 70.485,56.667 70.485,55.174 70.825,54.834 71.612,54.834 71.738,54.96 72.34,54.96 U23.2@72.34,55.738
  Bottom Layer w0.254: v1(57.9,56.6) 58.671,55.829 69.647,55.829 v1(70.544,56.727)
3V_Comp1_Reciever2: U33.1 U37.3 U41.2 | length 56.8
  Top Layer w0.254: v1(71.603,77.191) 71.603,72.212 71.851,71.964 71.989,71.964 72.319,71.633 73.067,71.633 v1(73.1,71.6)
  Bottom Layer w0.254: U33.1@50.769,79.829 50.19,79.829 49.733,79.372 49.733,76.962 49.682,76.911 49.682,76.16 50.074,75.768 50.622,75.768 52.295,77.441 52.295,78.565 55.162,81.432 55.673,81.432 56.312,80.793 56.312,69.426 ; U37.3@55.545,69.35 56.236,69.35 56.312,69.426 ; U41.2@71.374,70.889 71.419,70.934 72.134,70.934 72.696,71.496 72.996,71.496 v1(73.1,71.6) ; v1(71.603,77.191) 59.123,77.191 56.337,74.405 56.337,69.452 56.312,69.426
3V_Comp2_Reciever1: U22.1 U23.10 U25.3 | length 44.4
  Top Layer w0.254: U22.1@50.769,45.486 50.769,43.821 v1(50.825,43.764) ; U25.3@57.09,37.1 57.912,37.1 58.344,37.532 v1(58.344,38.532) 58.426,38.614 58.426,39.046 58.922,39.542 60.267,39.542 60.309,39.5 61.039,39.5 64.203,42.664 64.203,55.082 65.775,56.654 66.207,56.654 66.573,56.287 66.573,54.738 68.53,52.781 U23.10@68.53,49.988
  Bottom Layer w0.254: v1(50.825,43.764) 52.595,43.764 57.827,38.532 v1(58.344,38.532)
3V_Comp2_Reciever2: U40.1 U41.10 U43.3 | length 42.4
  Top Layer w0.254: v1(54.036,46.457) 56.82,46.457 60.477,50.114 60.477,65.456 v1(59.207,66.726)
  Bottom Layer w0.254: U40.1@50.769,52.021 51.382,52.021 51.668,51.736 51.668,48.619 v1@54.036,46.25 ; v1(54.036,46.457) v1@54.036,46.25 ; U43.3@57.145,46.25 v1@54.036,46.25 ; v1(59.207,66.726) 59.378,66.896 61.239,66.896 U41.10@65.624,67.079
3V_Comp3_Reciever1: U18.2 U28.1 U30.3 | length 24.3
  Top Layer w0.254: U28.1@50.769,17.678 55.55,17.678 v1(55.55,16.205) 55.55,15.714 U30.3@55.55,14.855 ; U18.2@65.9,22.04 67.049,22.04 v1(67.081,22.073)
  Bottom Layer w0.254: v1(55.55,16.205) 63.779,16.205 67.081,19.507 v1(67.081,22.073)
3V_Comp3_Reciever2: U36.2 U46.1 U48.3 | length 53
  Bottom Layer w0.254: U46.1@50.769,24.212 52.603,24.212 57.556,29.165 57.556,34.322 59.153,35.918 66.021,35.918 67.207,34.733 67.207,33.019 65.735,31.547 64.199,31.547 64.109,31.547 ; U48.3@56.472,19.112 56.472,17.449 56.621,17.3 61.168,17.3 64.199,20.331 64.199,31.457 64.109,31.547 ; U36.2@63.282,31.547 64.109,31.547
3V_Comp(Inv)1_Reciever1: U19.4 U23.4 | length 13.9
  Top Layer w0.254: U19.4@59.055,59.65 59.411,59.65 v1(59.411,58.572) ; U23.4@69.8,55.738 v1(69.8,57.353)
  Bottom Layer w0.254: v1(59.411,58.572) 60.63,57.353 v1(69.8,57.353)
3V_Comp(Inv)1_Reciever2: U37.4 U41.4 | length 14.2
  Bottom Layer w0.254: U37.4@58.055,69.35 59.715,69.35 61.298,67.767 68.758,67.767 69.34,68.349 U41.4@71.374,68.349
3V_Comp(Inv)2_Reciever1: U23.12 U25.4 | length 40.3
  Top Layer w0.254: v1(59.588,34.696) 59.588,37.1 U25.4@59.6,37.1 ; v1(66.167,34.29) 72.39,40.513 v1(72.39,43.459) ; U23.12@71.07,49.988 71.07,51.385 71.907,52.222 76.759,52.222 77.597,51.384 v1(77.597,48.666)
  Bottom Layer w0.254: v1(59.588,34.696) 60.782,33.503 65.38,33.503 v1(66.167,34.29) ; v1(72.39,43.459) v1(77.597,48.666)
3V_Comp(Inv)2_Reciever2: U41.12 U43.4 | length 32.9
  Top Layer w0.254: v1(61.239,43.205) 63.729,45.695 v1(63.729,68.859)
  Bottom Layer w0.254: U43.4@59.655,46.25 60.189,46.25 60.341,45.846 61.239,44.947 v1(61.239,43.205) ; v1(63.729,68.859) 64.488,69.619 U41.12@65.624,69.619
3V_Comp(Inv)3_Reciever1: U18.4 U30.4 | length 19.2
  Top Layer w0.254: U30.4@55.55,12.345 55.55,11.354 55.956,10.947 62.291,10.947 66.82,15.476 66.82,19.464 66.784,19.5 U18.4@65.9,19.5
3V_Comp(Inv)3_Reciever2: U36.4 U48.4 | length 23.1
  Bottom Layer w0.254: U48.4@56.472,21.622 56.472,22.962 62.001,28.491 62.001,31.412 62.72,32.131 65.735,32.131 65.75,32.116 66.827,33.193 66.827,34.557 66.409,34.976 64.516,34.976 63.627,34.087 U36.4@63.282,34.087
3V_Reciever1: R28.1 R31.2 U15.4 U22.4 U28.4 | length 153.6
  Top Layer w0.254: U28.4@48.569,19.578 49.327,19.578 49.327,7.772 47.992,7.772 45.063,10.701 45.063,41.963 45.475,42.375 48.192,43.663 ; U22.4@48.569,47.386 49.327,47.386 49.352,47.361 49.352,44.823 48.192,43.663 ; U15.4@48.569,75.195 49.327,75.195 49.327,85.115 ; R31.2@70.152,82.794 72.949,82.794 73.523,82.22 75.141,82.22 75.336,82.416 75.336,87.859 75.286,87.909 70.886,87.909 70.307,87.33 R28.1@70.152,87.33 69.444,87.33 66.934,89.84 52.872,89.84 49.327,86.294 49.327,85.115 ; 48.192,43.663 47.708,43.663 47.015,44.355 47.015,81.651 47.109,81.744 47.109,84.32 48.108,85.319 49.124,85.319 49.327,85.115
3V_Reciever2: R40.1 R43.2 U33.4 U40.4 U46.4 | length 109.1
  Bottom Layer w0.254: U46.4@48.569,22.312 47.842,22.312 46.921,23.234 46.921,50.006 47.036,50.121 ; U40.4@48.569,50.121 47.036,50.121 ; U33.4@48.569,77.929 47.752,77.929 ; R43.2@63.447,88.169 63.424,88.169 63.424,85.433 R40.1@63.447,85.433 65.176,85.433 65.748,84.861 68.605,84.861 68.605,90.145 68.462,90.288 47.999,90.288 45.39,87.679 45.39,78.41 45.87,77.929 47.752,77.929 ; 47.036,50.121 47.036,77.213 47.752,77.929
4V_Comp(Inv)1_Reciever1: U19.6 U23.1 | length 24.3
  Top Layer w0.254: v1(58.064,62.078) 58.064,61.804 58.318,61.55 U19.6@59.055,61.55 ; v1(72.39,54.308) 73.08,54.308 73.61,54.839 U23.1@73.61,55.738
  Bottom Layer w0.254: v1(58.064,62.078) 69.752,62.078 72.39,59.439 v1(72.39,54.308)
4V_Comp(Inv)1_Reciever2: U37.6 U41.1 | length 17.5
  Top Layer w0.254: v1(60.579,67.564) v1(60.579,71.45)
  Bottom Layer w0.254: U37.6@58.055,67.45 60.465,67.45 v1(60.579,67.564) ; v1(60.579,71.45) 66.624,71.45 67.333,72.159 U41.1@71.374,72.159
4V_Comp(Inv)2_Reciever1: U23.9 U25.6 | length 18.2
  Top Layer w0.254: U25.6@59.6,39 61.657,39 64.846,42.189 64.846,49.985 65.839,50.978 67.26,50.978 U23.9@67.26,49.988
4V_Comp(Inv)2_Reciever2: U41.9 U43.6 | length 31.1
  Top Layer w0.254: v1(60.833,46.507) 60.833,48.006 62.5,49.673 62.5,65.387 62.103,65.784 v1(62.103,65.809)
  Bottom Layer w0.254: U43.6@59.655,44.35 59.665,44.35 59.665,43.842 60.967,42.539 61.497,42.539 61.9,42.942 61.9,45.441 v1(60.833,46.507) ; v1(62.103,65.809) U41.9@65.624,65.809
4V_Comp(Inv)3_Reciever1: U18.1 U30.6 | length 17.6
  Top Layer w0.254: U30.6@57.45,12.345 57.45,13.462 61.697,13.462 64.033,15.799 64.033,22.523 64.821,23.31 U18.1@65.9,23.31
4V_Comp(Inv)3_Reciever2: U36.1 U48.6 | length 15.1
  Bottom Layer w0.254: U48.6@58.372,21.622 58.372,20.904 58.423,20.853 62.512,20.853 63.652,21.994 63.652,30.277 U36.1@63.282,30.277
4V_Reciever1: R27.2 R30.2 U14.4 U20.4 U27.4 | length 149.2
  Top Layer w0.254: v1(48.514,62.433) U20.4@48.514,56.656 ; U27.4@48.569,28.847 49.081,28.847 50.57,30.336 58.901,30.336 69.097,40.532 69.097,80.118 66.421,82.794 ; U20.4@48.569,56.656 U20.4@48.514,56.656 ; U14.4@48.569,84.464 47.803,84.464 47.498,84.159 47.498,81.376 47.434,81.311 47.434,57.24 48.018,56.656 U20.4@48.514,56.656 ; R27.2@65.707,88.89 65.227,88.89 64.994,88.657 64.994,86.771 65.707,86.058 R30.2@65.707,82.794 66.421,82.794 ; v1(66.421,63.779) 66.421,82.794
  Bottom Layer w0.254: v1(48.514,62.433) 49.86,63.779 v1(66.421,63.779)
4V_Reciever2: R39.2 R42.2 U32.4 U38.4 U45.4 | length 110.3
  Top Layer w0.254: v1(61.7,47.7) 61.746,47.7 62.9,48.854 62.9,66.183 62.01,67.073 v1(62.01,81.909)
  Bottom Layer w0.254: U45.4@48.569,31.582 49.378,31.582 49.809,32.014 49.809,33.741 53.288,37.219 63.737,37.219 64.186,37.668 64.186,40.361 62.677,41.87 62.677,45.611 60.764,47.523 ; U38.4@48.569,59.39 48.59,59.39 53.442,54.539 53.442,51.849 57.767,47.523 60.764,47.523 ; U32.4@48.569,87.199 47.904,87.199 47.904,83.247 48.322,82.829 50.927,82.829 51.971,83.873 R39.2@59.002,83.873 59.489,83.873 ; R42.2@59.002,88.169 59.507,88.169 59.704,87.971 59.704,84.088 59.489,83.873 ; v1(61.7,47.7) 61.678,47.678 60.919,47.678 60.764,47.523 ; v1(62.01,81.909) 60.046,83.873 59.489,83.873
12V: U1.4 U3.4 U4.4 U6.4 | length 25.7
  Top Layer w0.254: U3.4@27.27,44.8 27.27,45.558 27.61,45.898 36.723,45.898 36.926,45.695 ; U1.4@36.926,44.993 36.926,45.695 ; v1(36.926,46.914) 36.926,45.695
  Bottom Layer w0.254: U4.4@29.63,44.8 29.63,45.491 29.9,45.762 38.078,45.762 ; v1(36.926,46.914) 38.078,45.762 ; U6.4@39.43,44.9 39.43,45.762 38.078,45.762
24V: C5.2 J1.12 R11.2 R15.2 R19.2 R21.2 U7.1 | length 79.5
  Top Layer w0.254: C5.2@19,79.3 18.42,79.3 U7.1@18.42,71.3 14.834,67.714 14.834,50.74 J1.12@16.572,49.002 16.529,48.959 16.529,47.521 16.165,47.157 16.165,42.691 21.8,37.056 v1(21.8,37) ; R21.2@25.5,22.6 26.359,22.6 27.305,23.546 ; v1(26.1,35.9) R19.2@27.305,35.9 ; v1(27.3,21) 27.305,21.005 27.305,23.546 ; R19.2@27.5,35.9 R19.2@27.305,35.9 ; 27.305,23.546 R19.2@27.305,35.9
  Bottom Layer w0.254: R15.2@21.8,33.7 21.8,36.951 21.949,37.1 24.9,37.1 v1(26.1,35.9) ; R11.2@22.6,22.4 25.9,22.4 v1(27.3,21)
GND: C1.2 C2.1 C3.2 C4.1 C5.1 C6.1 C7.2 C8.2 C9.2 C10.2 C11.1 C12.1 C13.1 C14.1 C15.1 C16.1 C17.1 C18.1 C19.1 C20.1 C21.1 C22.1 C23.1 C24.1 C25.1 C26.1 C27.1 C28.1 C29.1 J1.9 Q2.2 Q3.2 Q4.2 Q5.2 Q7.2 Q8.2 R1.1 R3.1 R6.1 R8.1 R14.1 R18.1 R23.1 R26.1 R30.1 R31.1 R32.1 R33.1 R36.1 R37.2 R38.1 R42.1 R43.1 R44.1 R45.1 R48.1 R49.2 R50.1 U2.1 U5.1 U7.2 U7.4 U8.3 U9.3 U10.3 U11.3 U12.7 U13.7 U14.2 U15.2 U16.7 U17.2 U18.7 U19.2 U20.2 U21.5 U21.7 U22.2 U23.7 U24.2 U25.2 U26.2 U27.2 U28.2 U29.2 U30.2 U31.7 U32.2 U33.2 U34.7 U35.2 U36.7 U37.2 U38.2 U39.5 U39.7 U40.2 U41.7 U42.2 U43.2 U44.2 U45.2 U46.2 U47.2 U48.2 | length 426.9
  Top Layer w0.254: J1.9@16.572,56.622 15.22,57.974 15.22,63.994 17.546,66.319 23.647,66.319 24.5,65.467 R3.1@24.5,58.337 ; C9.2@30.9,14 30.9,14.199 31.877,15.176 31.877,20.05 ; U11.3@31.1,20.05 31.854,20.05 31.877,20.05 ; C10.2@32.1,29 32.1,30.353 31.598,30.855 31.598,33.875 31.623,33.9 U10.3@32.4,33.9 ; R1.1@33.654,58.383 33.654,57.871 v1(34.06,57.464) ; U12.7@35.1,22.82 35.966,22.82 37.5,21.286 C11.1@37.5,20.7 37.59,21.604 ; R38.1@40,12.94 40.474,12.94 40.716,13.183 40.716,18.415 33.512,18.415 31.877,20.05 ; R36.1@45.779,38.68 R36.1@45.822,38.68 ; v1(45.822,37.338) R36.1@45.822,38.68 ; 47.828,38.68 47.727,38.68 R36.1@45.822,38.68 ; 49.239,39.786 51.526,42.073 51.526,46.051 51.29,46.287 ; U29.2@50.769,9.358 51.816,9.358 52.426,9.968 52.426,14.935 v1(51.537,15.824) ; U28.2@50.769,18.628 51.292,18.628 51.537,18.872 v1(51.537,20.955) 50.017,22.475 50.017,27.571 50.343,27.897 U27.2@50.769,27.897 51.926,27.897 v1(52.629,28.6) ; U24.2@50.769,37.167 50.227,37.167 50.017,36.957 50.017,35.611 50.042,35.585 52.705,35.585 55.17,38.05 ; U22.2@50.769,46.436 U22.2@51.141,46.436 ; U15.2@50.769,74.245 51.537,74.245 51.537,70.567 52.457,69.647 53.01,69.647 53.696,70.332 53.696,86.574 v1(52.121,88.149) 52.121,84.099 51.536,83.514 U14.2@50.769,83.514 ; 51.437,64.975 U17.2@50.769,64.975 50.013,64.975 49.987,64.95 49.987,63.373 52.76,60.6 ; v1(51.537,52.883) 51.537,55.448 51.279,55.706 U20.2@50.769,55.706 50.013,55.706 50.013,57.852 52.76,60.6 ; 51.867,65.405 51.867,68.391 ; v1(54.789,37.871) 54.967,38.05 55.17,38.05 ; v1(55.601,32.532) 55.849,32.283 57.2,32.283 C17.1@57.2,32.3 ; v1(56.388,56.236) 56.6,56.024 C15.1@56.6,55.1 56.6,50.546 55.474,49.42 ; U30.2@56.5,14.855 56.5,15.17 57.042,15.712 58.171,15.712 58.487,15.396 v1(58.635,15.396) 59.431,14.6 C20.1@60.4,14.6 ; U19.2@56.545,60.6 55.88,60.6 ; U25.2@57.09,38.05 55.17,38.05 ; v1(64.447,14.58) 65.557,15.69 U18.7@65.9,15.69 ; U23.7@65.99,55.738 65.99,54.254 67.978,52.266 67.978,48.822 v1(68,48.8) ; R31.1@70.152,81.234 70.155,81.234 v1(70.155,75.87) ; v1(75.8,58.4) 75.8,53.9 C14.1@76,53.7 ; U13.7@80.958,40.309 81.305,40.309 81.381,40.234 84.836,40.234 84.861,40.259 v1(84.861,40.589) ; U21.5@83.83,24.35 83.83,25.288 81.178,27.94 81.178,29.947 81.94,30.709 82.017,30.709 84.049,28.677 84.049,28.493 v1(86.065,26.477) ; v1(83.874,28.668) v1@83.965,28.76 ; v1(90.4,44.9) 90.4,44.775 91.865,43.311 U16.7@91.865,42.867 ; C16.1@91.4,22.2 91.415,22.2 v1(91.415,26.568) ; U22.2@51.141,46.436 51.29,46.287 ; U22.2@51.141,46.436 51.29,46.287 ; 51.29,46.287 52.341,46.287 55.474,49.42 ; 52.76,60.6 55.88,60.6 ; 55.474,49.42 55.474,60.194 55.88,60.6
  Bottom Layer w0.254: R6.1@30.081,57.265 30.081,56.464 30.335,56.21 34.523,56.21 37.546,53.188 40.206,53.188 40.444,53.425 40.444,56.051 39.235,57.26 39.235,57.277 ; v1(34.06,57.464) 34.467,57.058 39.016,57.058 39.235,57.277 ; R8.1@39.235,57.819 39.235,57.277 ; R48.1@44.3,45.98 45.562,45.98 46.542,45 ; v1(45.822,37.338) 46.542,38.058 ; C4.1@46.312,79.074 46.312,79.978 46.312,80.035 ; 49.037,39.076 50.394,37.719 54.636,37.719 v1(54.789,37.871) 54.789,37.846 58.585,37.846 59.004,38.265 59.004,39.192 58.496,39.7 58.496,41.504 ; v1(49.733,40.996) 49.733,41.344 50.19,41.801 U42.2@50.769,41.801 ; U47.2@50.769,13.993 49.987,13.993 49.987,15.799 51.537,17.348 ; U46.2@50.769,23.262 51.537,23.262 v1(51.537,20.955) 51.537,17.348 ; U40.2@50.769,51.071 50.013,51.071 50.013,52.603 50.292,52.883 v1(51.537,52.883) ; U38.2@50.769,60.34 52.349,60.34 57.1,55.59 57.1,55.524 ; U35.2@50.769,69.61 51.46,69.61 51.867,69.204 51.867,68.391 ; U33.2@50.769,78.879 51.537,78.879 51.537,80.442 51.511,80.467 46.744,80.467 46.312,80.035 ; v1(51.537,15.824) 51.537,17.348 ; v1(52.121,88.149) U32.2@50.769,88.149 50.23,88.149 50.013,88.367 50.013,88.875 49.149,89.738 47.994,89.738 46.312,88.056 46.312,83.568 45.791,83.047 45.791,81.745 46.312,81.224 46.312,80.035 ; v1(52.629,28.6) 52.629,31.719 51.816,32.532 v1(55.601,32.532) ; U37.2@55.545,68.4 54.686,68.4 54.686,71.578 55.6,72.492 C24.1@55.6,73.7 ; v1(56.388,56.236) 57.1,55.524 ; U43.2@57.145,45.3 57.912,45.3 58.496,44.716 58.496,41.504 ; v1(58.635,15.396) 59.451,14.58 v1(64.447,14.58) ; U36.7@63.282,37.897 62.103,37.897 58.496,41.504 ; v1(68,48.8) 62.699,48.8 62.447,48.548 57.512,48.548 57.443,48.548 57.295,48.697 57.261,48.763 C26.1@57.1,49.8 57.1,55.524 ; C23.1@68.791,75.842 68.791,75.87 v1(70.155,75.87) ; v1(75.8,58.4) 75.8,58.5 77.2,59.9 77.597,59.9 78.606,59.9 78.66,59.846 83.645,59.846 83.972,60.173 83.972,64.637 83.535,65.075 82.095,65.075 81.737,64.717 U31.7@81.395,64.717 ; 83.645,59.842 85.94,59.842 U39.5@85.94,60.75 ; v1(83.874,28.668) 83.882,28.677 85.8,28.677 C22.1@85.8,29.2 ; v1(84.861,40.589) 84.45,40.178 U34.7@84.45,39.81 85.481,39.81 90.296,44.624 90.296,44.796 91.08,45.58 91.08,46.651 95.28,50.852 R49.2@95.28,51.9 ; v1(86.065,26.477) 86.157,26.568 v1(91.415,26.568)
  other v1: 72.9,11.406 66.624,11.723 74.995,12.978 81.7,13.7 70.67,14.231 78.6,15.2 21.3,15.3 32.339,15.608 40.2,17 74.399,17.21 80.6,17.4 20.6,18.1 40.2,18.5 23.26,18.793 78.6,19.4 60.155,19.897 6.388,20.241 53.892,20.539 79.2,24.7 26.1,25.3 28.1,25.3 30.983,25.645 38.885,25.935 62.408,25.987 78.1,26.2 23.4,26.4 65.854,26.595 82.504,26.614 37.37,27.2 6.1,27.3 71.968,27.378 60.6,29.2 75.026,29.442 73.059,29.486 23,29.6 48.7,30.4 31.77,30.781 52.919,32.106 70.939,32.223 3.9,33.5 28.124,34.51 49,34.9 54.6,35.9 73.028,36.078 88.489,36.108 49.6,37.1 71.4,37.5 63.249,39.309 49.7,39.4 53.702,40.401 60.411,40.591 68.2,41.4 73.3,41.6 70,41.7 56.51,42.741 78.517,43.087 76.39,43.194 67.406,45.361 82.476,45.834 72.574,47.252 80.796,47.593 45.266,48.066 40.781,49.219 85.585,50.179 41.616,51.326 83.731,52.139 22.4,52.8 88.85,53.199 65.388,53.713 92.6,55.3 40.6,56.6 45.363,56.775 74.018,57.519 65.041,58.477 42,58.6 85.9,59.4 61.269,59.463 72.881,62.577 52,62.8 55.375,62.903 67.85,63.512 88.882,63.737 73.4,64.5 91.362,66.353 52.6,66.5 88.8,66.5 86.1,66.8 51.9,69.8 29.8,72.7 33.8,76.7 65.089,78.997 70.317,79.865 68.8,81.6 32.3,81.9 59.045,82.548 53.512,83.057 57.401,84.539 53.234,84.585 70.593,85.025 57.818,86.599